# Altium PCB DG141V-2.54-08P_2025-03-13.pcbdoc
Units mm, origin at the board's own origin, x right, y up, seen from the top; angles counter-clockwise.
Board outline 50.62 x 38.7 mm, 2 copper layers (Top Layer, Bottom Layer); 1 components, 0 nets, 16 pads, 0 vias.
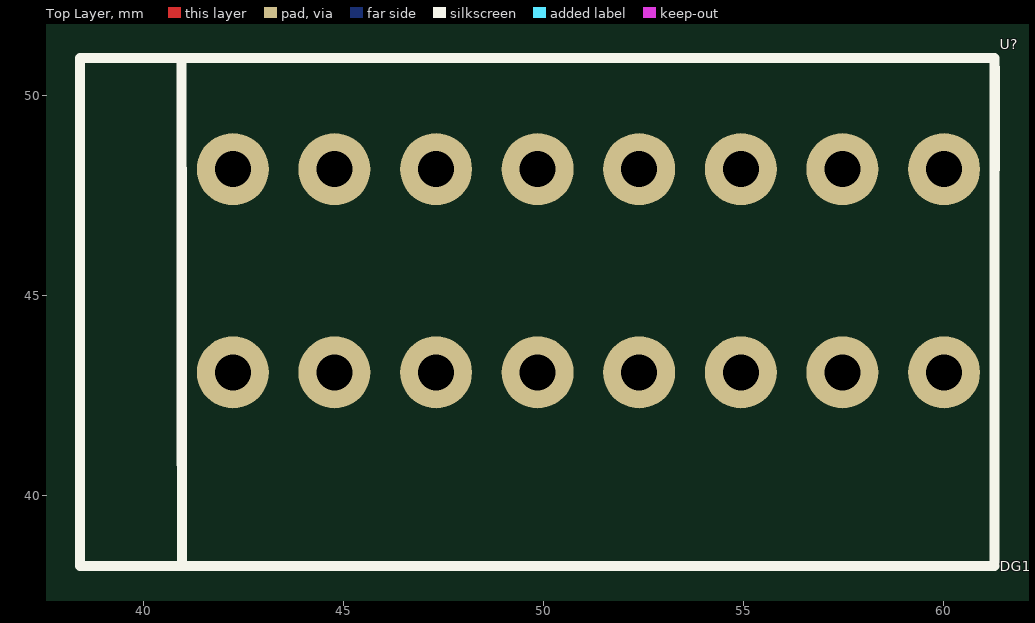
[diagram p0: Top Layer view]
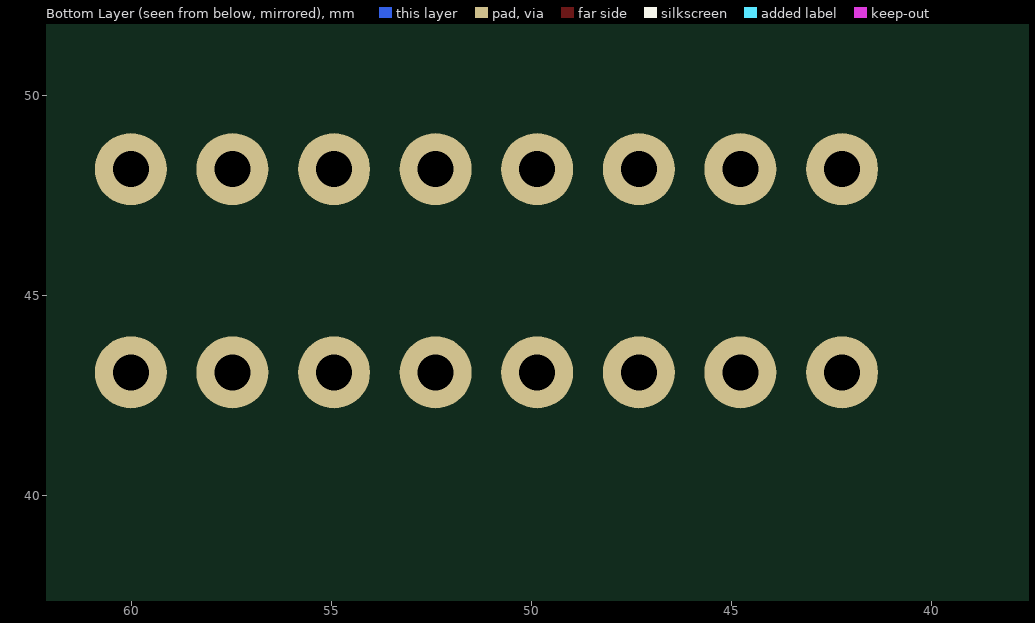
[diagram p1: Bottom Layer view, seen from below]

## Layer stack, top to bottom
Top Layer: signal copper (thickness not stored)
Dielectric: dielectric 0.32, FR-4, Dk 4.8
Bottom Layer: signal copper (thickness not stored)

## Board outline
76.017,25.4 25.4,25.4 25.4,64.104 76.017,64.104

## Components (designator, comment, footprint, x,y, rotation, side; value= is the part's Value field where it differs from the comment)
U? "DG141V-2.54-08P" DG141V-2.54-08P 49.756,44.625 r0 top

## Footprints (in the part's own frame and the unit in brackets; to place one, negate y for a bottom-side part, rotate by r counter-clockwise, add the part's x,y. Pads: shape width x height; smd on the part's side, far side on the other; paste and mask are expansions set on the pad)
DG141V-2.54-08P [mm]
  round 1.8 hole 0.9 paste+0 mask+0.102: 1(-7.521,-1.558) 1(-7.521,3.522) 2(-4.981,-1.558) 2(-4.981,3.522) 3(-2.441,-1.558) 3(-2.441,3.522) 4(0.099,-1.558) 4(0.099,3.522) 5(2.639,-1.558) 5(2.639,3.522) 6(5.179,-1.558) 6(5.179,3.522) 7(7.719,-1.558) 7(7.719,3.522) 8(10.259,-1.558) 8(10.259,3.522)
  silkscreen extent -11.34,-6.4 11.53,6.3

## Nets (pads, with @x,y where several pads share a name; then routed paths per layer and width w, separated by ;. In a path a pad name is that pad's centre, name@x,y a point inside that pad or via, vN(x,y) a via of type N, cw(c..) or ccw(c..) an arc to the next point about the centre after c; other vN are vias at no path point)
pads on no net: U?.1 U?.2 U?.3 U?.4 U?.5 U?.6 U?.7 U?.8

## Silkscreen, mask and mechanical layers (free items; w line width, h text height)
Document:
  lines w0.003: 50.708,44.752 50.709,44.752